# EAGLE board equipment_fault_detection_and_correction_system_tinkerCAD (EAGLE 9.7.0)

Size 370.86 x 145.43 mm. Coordinates in mm from the lower left corner, seen from the top.
Outline: 0,0 370.86,0 370.86,145.44 0,145.44 0,0
Copper layers (1*16): Top 0.035mm / dielectric 1.5mm / Bottom 0.035mm
Design rules "default": minimum track width 6mil, minimum drill 0.35mm, track to track 6mil, track to pad 6mil, pad to pad 6mil, via to via 6mil, smd to smd 6mil, copper to edge 40mil, drill to drill 6mil, minimum pad ring 10mil, minimum via ring 8mil, stop-mask expansion 4mil, vias tented up to drill 0mil, thermal gap 10mil

## Footprints (pad centres in the part's own frame; a part is rotated, then mirrored left to right if it is on the bottom)
BATTERY-GENERIC = drill 1.118 pad 3.15 octagon: + 2.54,0; - -2.54,0
CAP-THRU-2.54MM = drill 1.016 pad 1.88: 1 -1.27,0; 2 1.27,0
LEDRD254W60D565H860B = drill 0.981 pad 1.581: 1 -1.27,0; 2 1.27,0
LEDRD254W60D565H860B_G = drill 0.981 pad 1.581: 1 -1.27,0; 2 1.27,0
LEDRD254W60D565H860B_Y = drill 0.981 pad 1.581: 1 -1.27,0; 2 1.27,0
DIODE-AXIAL = drill 1: 1 -5.08,0; 2 5.08,0
MOTOR = drill 1.118 pad 3.15 octagon: + 2.54,0; - -2.54,0
PIEZO = drill 1 pad 1.6: 1 -3.5,0; 2 3.5,0
RESAD1016W63L850D250B = drill 0.83 pad 1.43: 1 -5.08,0; 2 5.08,0
HA-06-SM065 = drill 1 pad 1.676: 1 -2.54,-2.54; 2 0,2.54; 3 2.54,-2.54
SWITCH-MOMENTARY-PTH-6.5MM = drill 1.016 pad 1.88: 1 -3.251,2.261; 2 3.251,2.261; 3 -3.251,-2.261; 4 3.251,-2.261
78B04ST = drill 0.8: 1 -3.81,-3.81; 2 -1.27,-3.81; 3 1.27,-3.81; 4 3.81,-3.81; 5 3.81,3.81; 6 1.27,3.81; 7 -1.27,3.81; 8 -3.81,3.81
TO92 = drill 0.813 octagon: 1 -1.27,0; 2 0,1.905; 3 1.27,0
ARDUINO-UNO-R3-SHIELD = drill 1.016 pad 1.88: 3.3V 24.13,-2.54; 5V 24.13,0; A0 24.13,12.7; A1 24.13,15.24; A2 24.13,17.78; A3 24.13,20.32; A4 24.13,22.86; A5 24.13,25.4; AREF -24.13,-13.97; D2 -24.13,20.32; D3 -24.13,17.78; D4 -24.13,15.24; D5 -24.13,12.7; D6 -24.13,10.16; D7 -24.13,7.62; D8 -24.13,3.81; D9 -24.13,1.27; D10 -24.13,-1.27; D11 -24.13,-3.81; D12 -24.13,-6.35; D13 -24.13,-8.89; GND@0 24.13,2.54; GND@1 24.13,5.08; GND@2 -24.13,-11.43; IOREF 24.13,-7.62; NC 24.13,-10.16; RES 24.13,-5.08; RX -24.13,25.4; SCL -24.13,-19.05; SDA -24.13,-16.51; TX -24.13,22.86; VIN 24.13,7.62

## Placement (x,y rotation side)
BAT1  9V  [BATTERY-GENERIC]  15.26,104.43 180 top
C1  10u  [CAP-THRU-2.54MM]  195.77,137.56 270 top
C2  10u  [CAP-THRU-2.54MM]  195.77,124.86 270 top
D1  RED  [LEDRD254W60D565H860B]  78.7,88.54 180 top
D2  GREEN  [LEDRD254W60D565H860B_G]  88.86,88.54 180 top
D3  YELLOW  [LEDRD254W60D565H860B_Y]  83.78,88.54 180 top
D4  DIODEDIODE-AXIAL  [DIODE-AXIAL]  9.01,120.06 0 top
M1  MOTOR_HDR  [MOTOR]  35.25,124.09 0 top
PIEZO1  PIEZO  [PIEZO]  158.41,127.9 0 top
R1  220  [RESAD1016W63L850D250B]  82.51,75.84 90 top
R2  220  [RESAD1016W63L850D250B]  77.43,75.84 90 top
R3  10k  [RESAD1016W63L850D250B]  92.67,121.56 90 top
R4  220  [RESAD1016W63L850D250B]  87.59,75.84 90 top
R5  1k  [RESAD1016W63L850D250B]  64.73,91.08 90 top
R6  10k  [RESAD1016W63L850D250B]  97.73,125.85 90 top
R7  10k  [RESAD1016W63L850D250B]  102.9,125.99 90 top
R8  10k  [RESAD1016W63L850D250B]  200.85,133.75 0 top
R9  10k  [RESAD1016W63L850D250B]  200.85,128.67 0 top
RPOT4  250k  [HA-06-SM065]  294.34,31.66 0 top
RPOT5  250k  [HA-06-SM065]  266.4,29.12 0 top
S1  SWITCH_MOMENTARY  [SWITCH-MOMENTARY-PTH-6.5MM]  90.13,138.07 270 top
SW2  SPST-478B04ST  [78B04ST]  111.37,133.58 0 top
T1  NPN  [TO92]  64.73,106.32 0 top
U1  ARDUINO-UNO-R3-SHIELD  [ARDUINO-UNO-R3-SHIELD]  336.34,97.19 270 top
U2  ARDUINO-UNO-R3-SHIELD  [ARDUINO-UNO-R3-SHIELD]  87.27,29.84 270 top

## Library data of the parts
BAT1 C1 C2 D4 M1 PIEZO1 R1-R9 RPOT4 RPOT5 S1 SW2 U1 U2 = Tinkercad
D1 = Tinkercad; CATEGORY: Opto-Electronic; SUB-CATEGORY: LED; VALUE: LED_RED
D2 = Tinkercad; CATEGORY: Opto-Electronic; SUB-CATEGORY: LED; VALUE: LED_GREEN
D3 = Tinkercad; CATEGORY: Opto-Electronic; SUB-CATEGORY: LED; VALUE: LED_YELLOW
T1 = Tinkercad; CATEGORY: Transistor; SUB-CATEGORY: BJT; TYPE: NPN

## Nets
BAT1+: BAT1.+ D4.2 M1.+
BAT1-: BAT1.- C1.1 C2.2 PIEZO1.2 R1.1 R2.1 R3.1 R4.1 R6.1 R7.1 RPOT4.3 RPOT5.3 T1.3 U1.GND@0 U1.GND@1 U1.GND@2 U2.GND@0 U2.GND@1 U2.GND@2
D1_C: D1.2 R2.2
D2_C: D2.2 R4.2
D3_C: D3.2 R1.2
M1_-: D4.1 M1.- T1.1
SW2_7: R7.2 SW2.7
SW2_8: R6.2 SW2.8
T1_B: R5.2 T1.2
U1_5V: RPOT4.1 RPOT5.1 U1.5V
U1_A0: RPOT5.2 U1.A0
U1_A1: RPOT4.2 U1.A1
U1_D3: R8.2 U1.D3
U1_D5: R9.2 U1.D5
U2_5V: S1.4 U2.5V
U2_A0: C2.1 R9.1 U2.A0
U2_A1: C1.2 R8.1 U2.A1
U2_D2: PIEZO1.1 U2.D2
U2_D4: SW2.2 U2.D4
U2_D5: SW2.1 U2.D5
U2_D6: R5.1 U2.D6
U2_D7: R3.2 S1.1 S1.2 U2.D7
U2_D8: D2.1 U2.D8
U2_D9: D3.1 U2.D9
U2_D10: D1.1 U2.D10

## Tracks (layer width: path | path; a pad name or v marks a point on that pad's centre or on a via)
BAT1+  (2 unrouted)
BAT1-  (18 unrouted)
D1_C  (1 unrouted)
D2_C  (1 unrouted)
D3_C  (1 unrouted)
M1_-  (2 unrouted)
SW2_7  (1 unrouted)
SW2_8  (1 unrouted)
T1_B  (1 unrouted)
U1_5V  (2 unrouted)
U1_A0  (1 unrouted)
U1_A1  (1 unrouted)
U1_D3  (1 unrouted)
U1_D5  (1 unrouted)
U2_5V  (1 unrouted)
U2_A0  (2 unrouted)
U2_A1  (2 unrouted)
U2_D2  (1 unrouted)
U2_D4  (1 unrouted)
U2_D5  (1 unrouted)
U2_D6  (1 unrouted)
U2_D7  (3 unrouted)
U2_D8  (1 unrouted)
U2_D9  (1 unrouted)
U2_D10  (1 unrouted)